# EAGLE board sound-detector-Panel-v10 (EAGLE 6.5.0), part 1 of 2
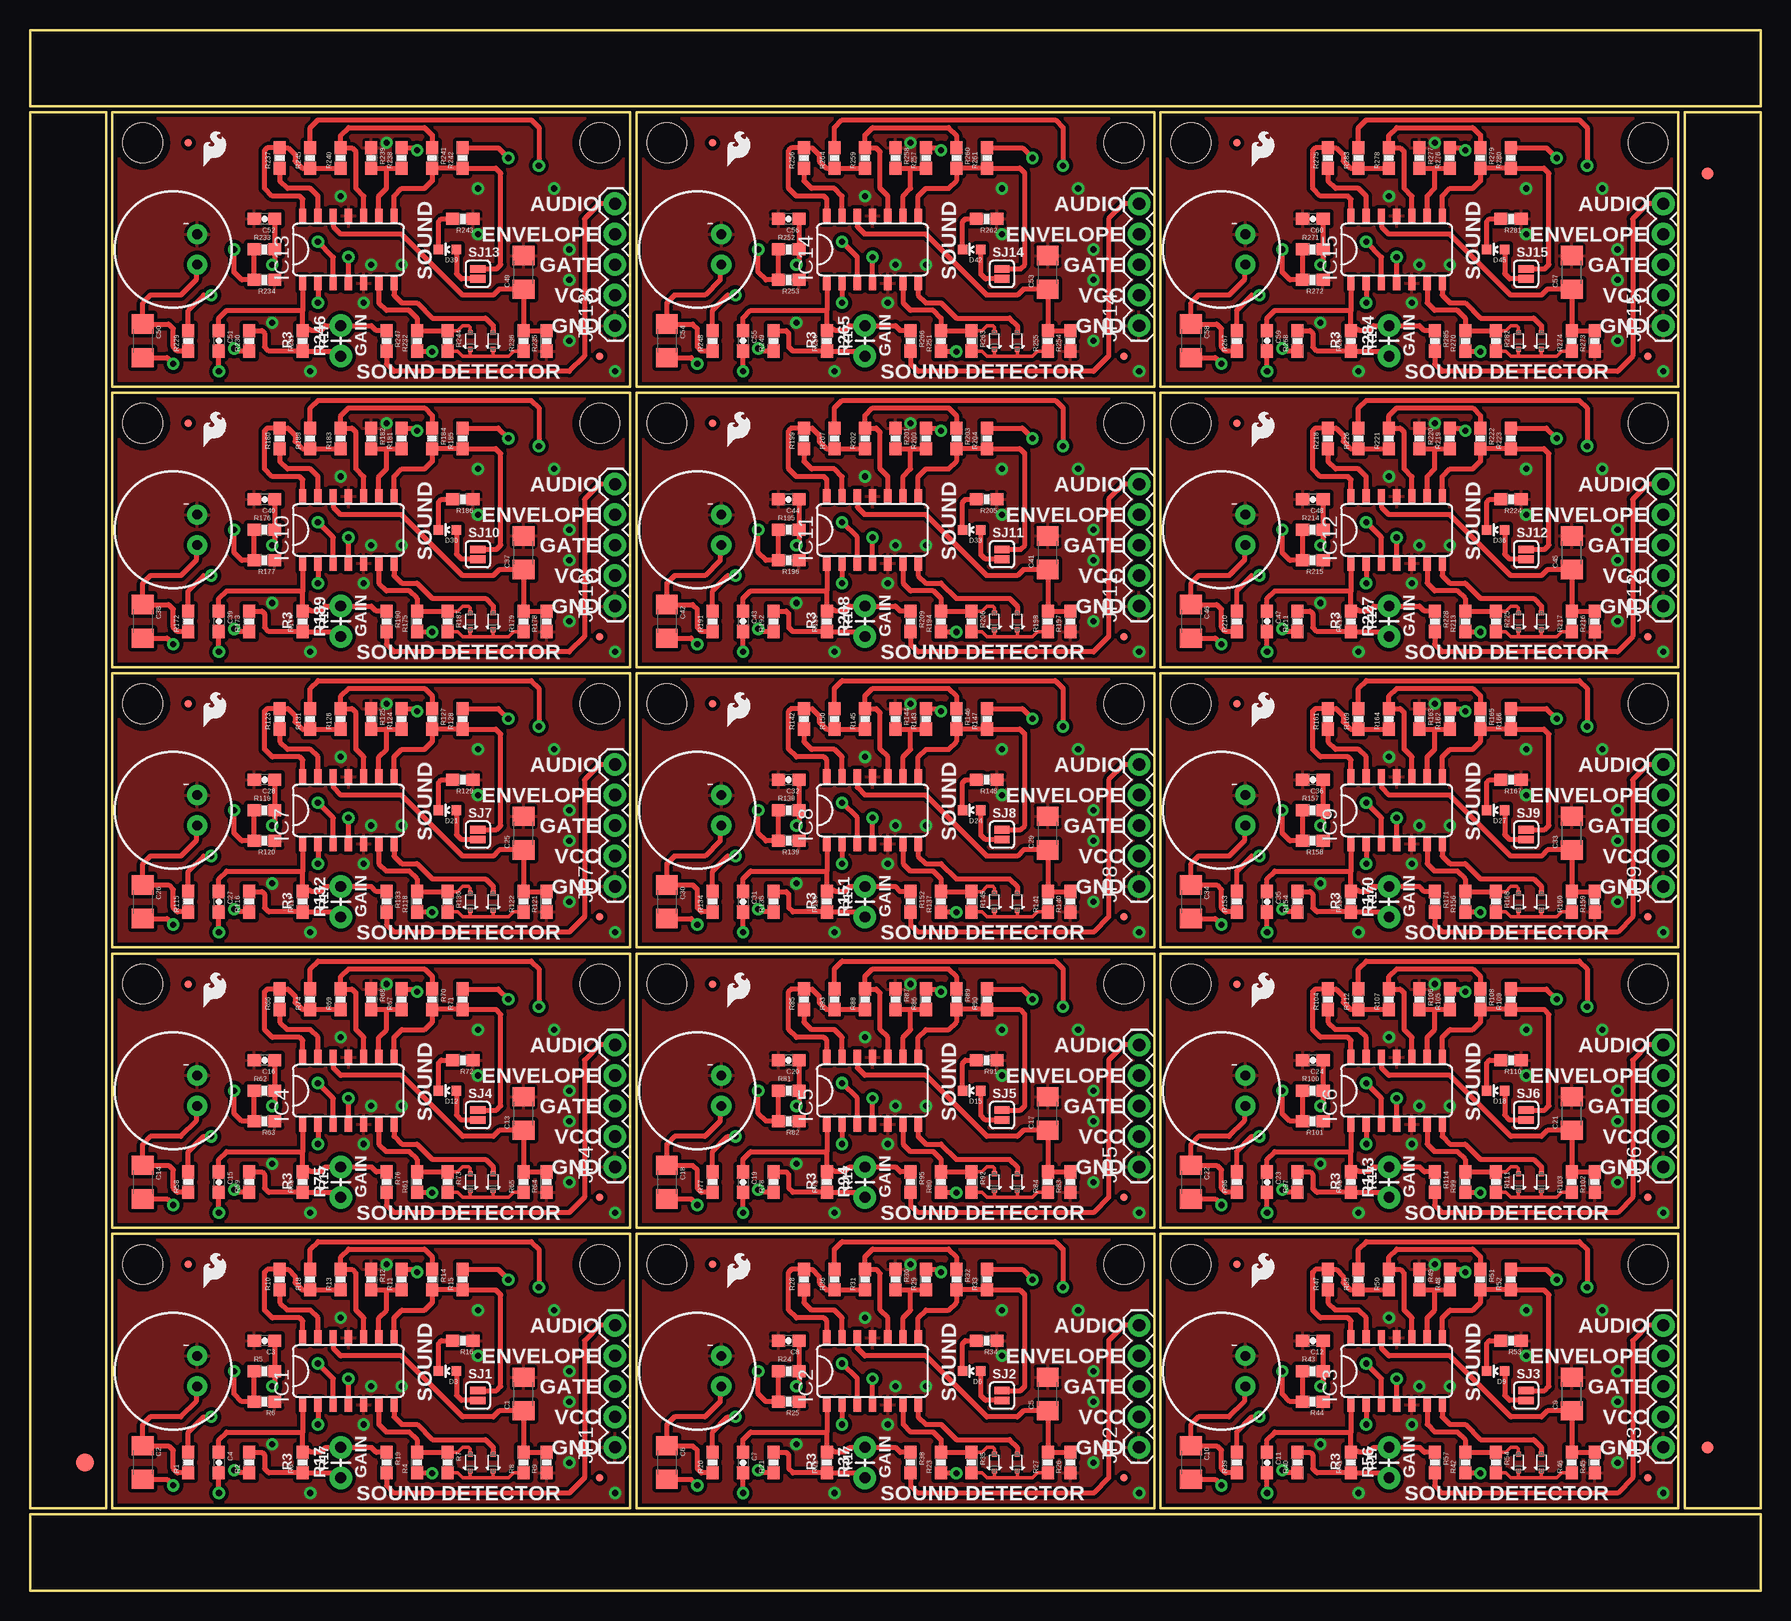
[diagram p0: board, top side]
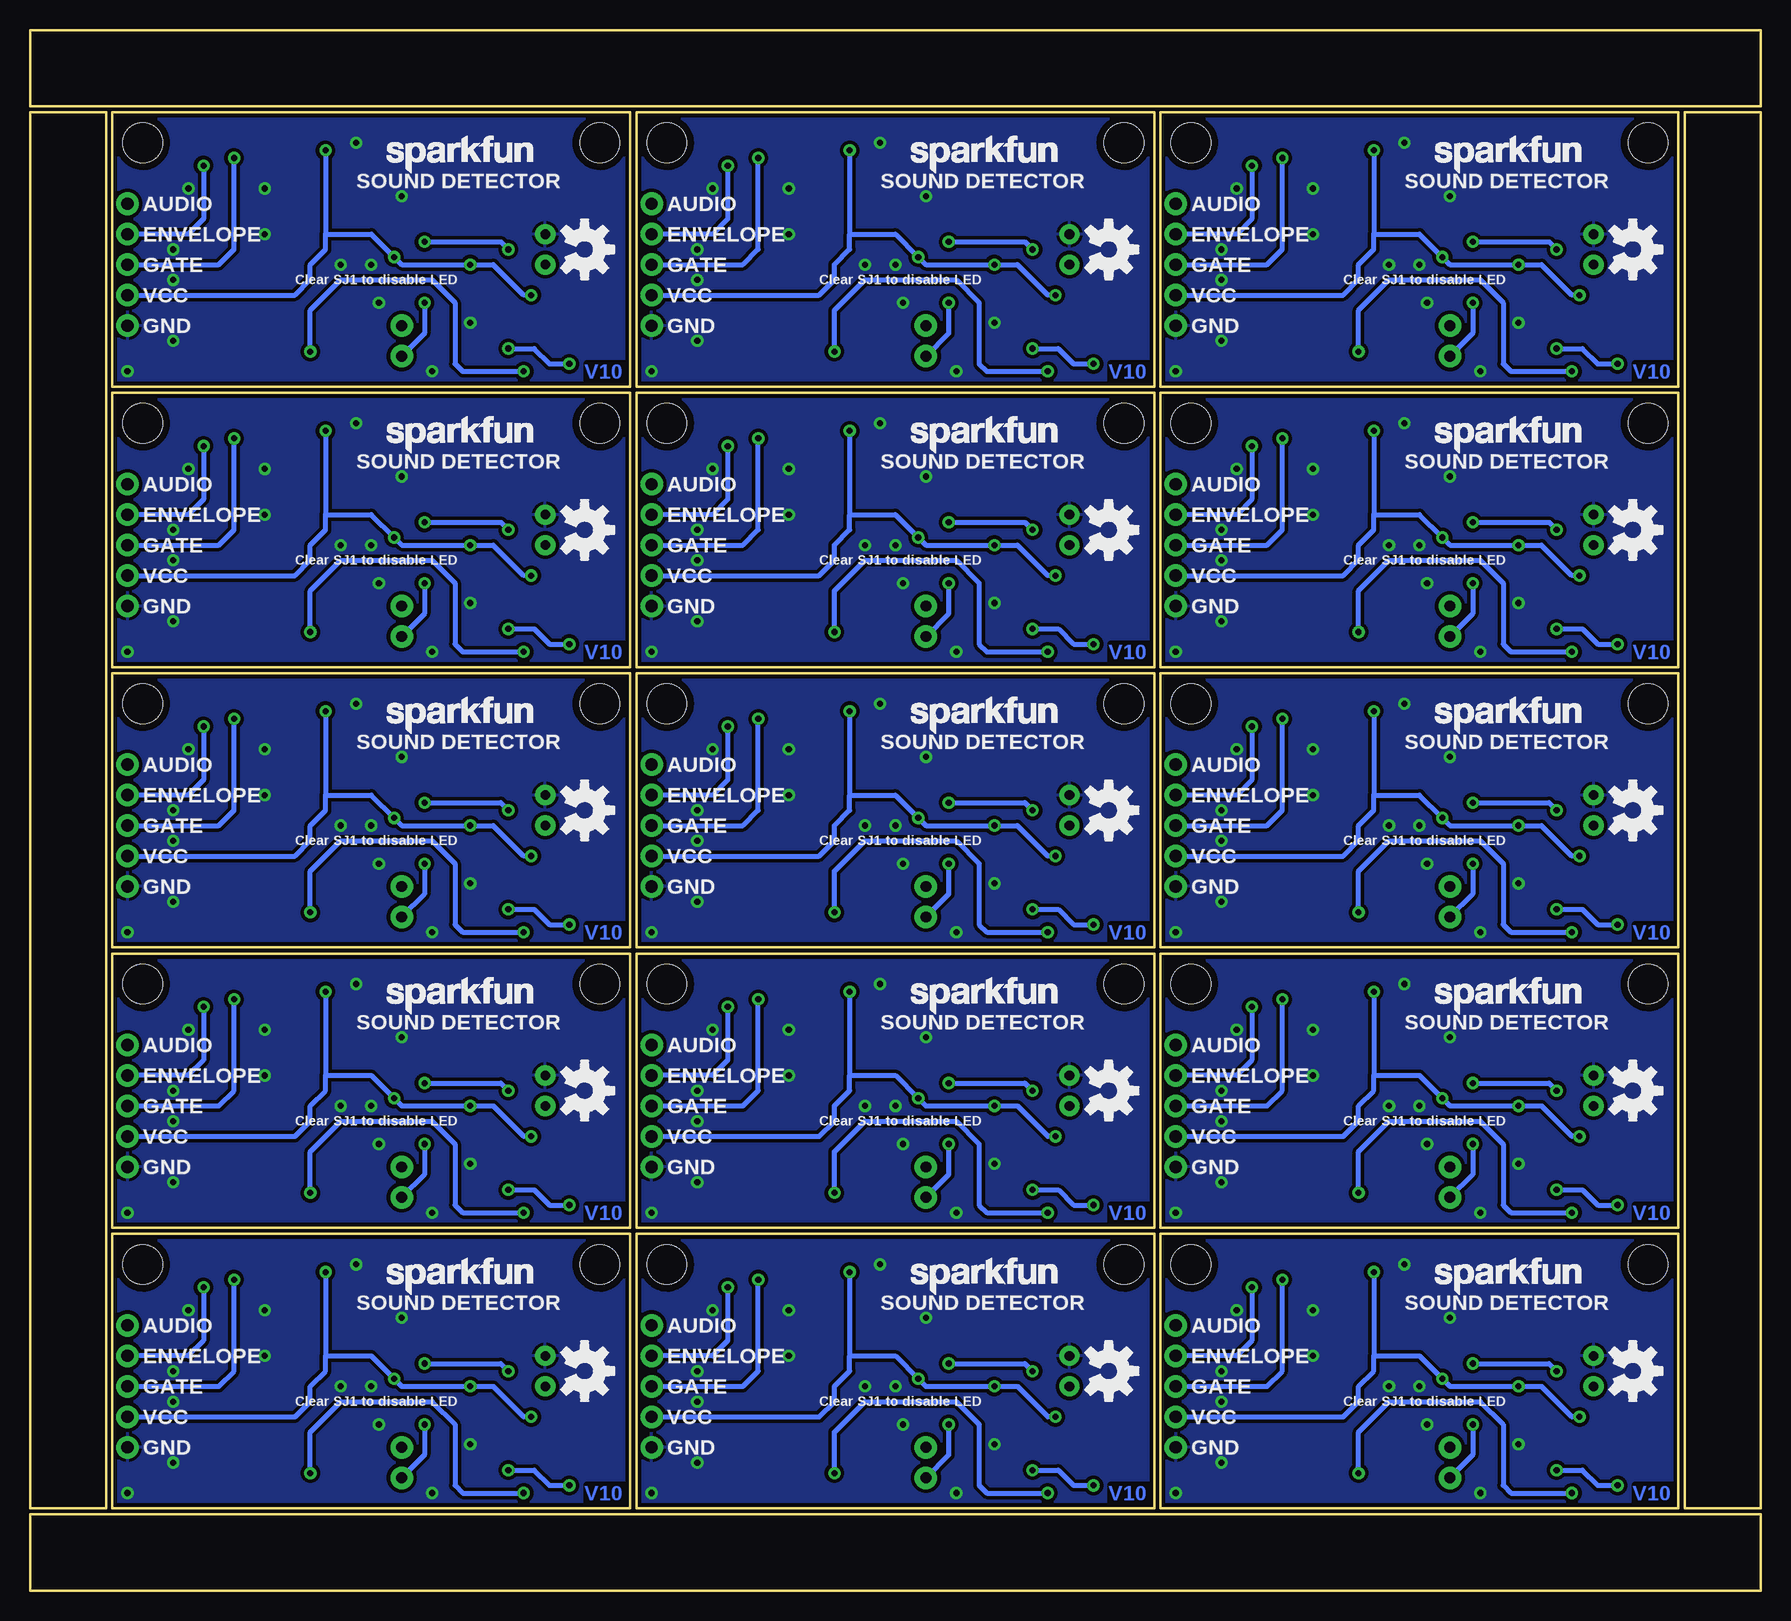
[diagram p1: board, bottom side, seen from below]

Size 144.27 x 130.05 mm. Coordinates in mm from the lower left corner, seen from the top.
Outline: 6.86,6.86 50.04,6.86 50.04,29.72 6.86,29.72 6.86,6.86
Outline: 50.55,6.86 93.73,6.86 93.73,29.72 50.55,29.72 50.55,6.86
Outline: 94.23,6.86 137.41,6.86 137.41,29.72 94.23,29.72 94.23,6.86
Outline: 6.86,30.23 50.04,30.23 50.04,53.09 6.86,53.09 6.86,30.23
Outline: 50.55,30.23 93.73,30.23 93.73,53.09 50.55,53.09 50.55,30.23
Outline: 94.23,30.23 137.41,30.23 137.41,53.09 94.23,53.09 94.23,30.23
Outline: 6.86,53.59 50.04,53.59 50.04,76.45 6.86,76.45 6.86,53.59
Outline: 50.55,53.59 93.73,53.59 93.73,76.45 50.55,76.45 50.55,53.59
Outline: 94.23,53.59 137.41,53.59 137.41,76.45 94.23,76.45 94.23,53.59
Outline: 6.86,76.96 50.04,76.96 50.04,99.82 6.86,99.82 6.86,76.96
Outline: 50.55,76.96 93.73,76.96 93.73,99.82 50.55,99.82 50.55,76.96
Outline: 94.23,76.96 137.41,76.96 137.41,99.82 94.23,99.82 94.23,76.96
Outline: 6.86,100.33 50.04,100.33 50.04,123.19 6.86,123.19 6.86,100.33
Outline: 50.55,100.33 93.73,100.33 93.73,123.19 50.55,123.19 50.55,100.33
Outline: 94.23,100.33 137.41,100.33 137.41,123.19 94.23,123.19 94.23,100.33
Outline: 6.35,6.86 6.35,123.19 0,123.19 0,6.86 6.35,6.86
Outline: 0,0 144.27,0 144.27,6.35 0,6.35 0,0
Outline: 144.27,6.86 144.27,123.19 137.92,123.19 137.92,6.86 144.27,6.86
Outline: 144.27,130.05 0,130.05 0,123.7 144.27,123.7 144.27,130.05
Copper layers (1*16): Top 0.035mm / dielectric 1.5mm / Bottom 0.035mm
Design rules "SparkFun-2-layer *": minimum track width 7mil, minimum drill 15mil, track to track 8mil, track to pad 8mil, pad to pad 8mil, via to via 8mil, smd to smd 8mil, copper to edge 8mil, drill to drill 8mil, minimum pad ring 12mil, minimum via ring 10mil, stop-mask expansion 4mil, vias tented up to drill 20mil, thermal gap 10mil

## Footprints (pad centres in the part's own frame; a part is rotated, then mirrored left to right if it is on the bottom)
1206 = smd 1.6 x 1.8: 1 -1.4,0; 2 1.4,0
0603-CAP = smd 1.1 x 1: 1 -0.85,0; 2 0.85,0
SOD-523 = smd 0.4 x 0.4: A -0.7,0; C 0.7,0
LED-0603 = smd 0.8 x 0.8: A 0,-0.75; C 0,0.75
FIDUCIAL-1.5X3 = smd 1.5 x 1.5: 1 0,0
FIDUCIAL-1X2 = smd 1 x 1: 1 0,0
MICRO-FIDUCIAL = smd 0.635 x 0.635: 1 0,0
SO014 = smd 0.6 x 1.2: 1 -3.175,-2.8; 2 -1.905,-2.8; 3 -0.635,-2.8; 4 0.635,-2.8; 5 1.905,-2.8; 6 3.175,-2.8; 7 4.445,-2.8; 8 4.445,2.8; 9 3.175,2.8; 10 1.905,2.8; 11 0.635,2.8; 12 -0.635,2.8; 13 -1.905,2.8; 14 -3.175,2.8
1X05 = drill 1.016 pad 1.88: 1 0,0; 2 2.54,0; 3 5.08,0; 4 7.62,0; 5 10.16,0
MIC-9.7MM = drill 0.8 pad 1.676: 1 -2,1.27; 2 -2,-1.27
0603-RES = smd 1.1 x 1: 1 -0.85,0; 2 0.85,0
AXIAL-0.1EZ = drill 0.9 pad 1.88: P$1 0,0; P$2 2.54,0
SJ_2S = smd 0.635 x 1.27: 1 -0.412,0; 2 0.412,0
STAND-OFF = hole 3.302: 0,0

## Placement (x,y rotation side)
C1  10uF  [1206]  41.15,16.38 90 top
C2  10uF  [1206]  9.4,10.67 270 top
C3  1.0uF  [0603-CAP]  19.56,20.83 180 top
C4  1.0uF  [0603-CAP]  15.75,10.67 270 top
C5  10uF  [1206]  84.84,16.38 90 top
C6  10uF  [1206]  53.09,10.67 270 top
C7  1.0uF  [0603-CAP]  59.44,10.67 270 top
C8  1.0uF  [0603-CAP]  63.25,20.83 180 top
C9  10uF  [1206]  128.52,16.38 90 top
C10  10uF  [1206]  96.77,10.67 270 top
C11  1.0uF  [0603-CAP]  103.12,10.67 270 top
C12  1.0uF  [0603-CAP]  106.93,20.83 180 top
C13  10uF  [1206]  41.15,39.75 90 top
C14  10uF  [1206]  9.4,34.04 270 top
C15  1.0uF  [0603-CAP]  15.75,34.04 270 top
C16  1.0uF  [0603-CAP]  19.56,44.2 180 top
C17  10uF  [1206]  84.84,39.75 90 top
C18  10uF  [1206]  53.09,34.04 270 top
C19  1.0uF  [0603-CAP]  59.44,34.04 270 top
C20  1.0uF  [0603-CAP]  63.25,44.2 180 top
C21  10uF  [1206]  128.52,39.75 90 top
C22  10uF  [1206]  96.77,34.04 270 top
C23  1.0uF  [0603-CAP]  103.12,34.04 270 top
C24  1.0uF  [0603-CAP]  106.93,44.2 180 top
C25  10uF  [1206]  41.15,63.12 90 top
C26  10uF  [1206]  9.4,57.4 270 top
C27  1.0uF  [0603-CAP]  15.75,57.4 270 top
C28  1.0uF  [0603-CAP]  19.56,67.56 180 top
C29  10uF  [1206]  84.84,63.12 90 top
C30  10uF  [1206]  53.09,57.4 270 top
C31  1.0uF  [0603-CAP]  59.44,57.4 270 top
C32  1.0uF  [0603-CAP]  63.25,67.56 180 top
C33  10uF  [1206]  128.52,63.12 90 top
C34  10uF  [1206]  96.77,57.4 270 top
C35  1.0uF  [0603-CAP]  103.12,57.4 270 top
C36  1.0uF  [0603-CAP]  106.93,67.56 180 top
C37  10uF  [1206]  41.15,86.49 90 top
C38  10uF  [1206]  9.4,80.77 270 top
C39  1.0uF  [0603-CAP]  15.75,80.77 270 top
C40  1.0uF  [0603-CAP]  19.56,90.93 180 top
C41  10uF  [1206]  84.84,86.49 90 top
C42  10uF  [1206]  53.09,80.77 270 top
C43  1.0uF  [0603-CAP]  59.44,80.77 270 top
C44  1.0uF  [0603-CAP]  63.25,90.93 180 top
C45  10uF  [1206]  128.52,86.49 90 top
C46  10uF  [1206]  96.77,80.77 270 top
C47  1.0uF  [0603-CAP]  103.12,80.77 270 top
C48  1.0uF  [0603-CAP]  106.93,90.93 180 top
C49  10uF  [1206]  41.15,109.86 90 top
C50  10uF  [1206]  9.4,104.14 270 top
C51  1.0uF  [0603-CAP]  15.75,104.14 270 top
C52  1.0uF  [0603-CAP]  19.56,114.3 180 top
C53  10uF  [1206]  84.84,109.86 90 top
C54  10uF  [1206]  53.09,104.14 270 top
C55  1.0uF  [0603-CAP]  59.44,104.14 270 top
C56  1.0uF  [0603-CAP]  63.25,114.3 180 top
C57  10uF  [1206]  128.52,109.86 90 top
C58  10uF  [1206]  96.77,104.14 270 top
C59  1.0uF  [0603-CAP]  103.12,104.14 270 top
C60  1.0uF  [0603-CAP]  106.93,114.3 180 top
D1  RB751  [SOD-523]  36.7,10.67 270 top
D2  RB751  [SOD-523]  38.61,10.67 270 top
D3  RED  [LED-0603]  34.8,18.29 90 top
D4  RB751  [SOD-523]  80.39,10.67 270 top
D5  RB751  [SOD-523]  82.3,10.67 270 top
D6  RED  [LED-0603]  78.49,18.29 90 top
D7  RB751  [SOD-523]  124.08,10.67 270 top
D8  RB751  [SOD-523]  125.98,10.67 270 top
D9  RED  [LED-0603]  122.17,18.29 90 top
D10  RB751  [SOD-523]  36.7,34.04 270 top
D11  RB751  [SOD-523]  38.61,34.04 270 top
D12  RED  [LED-0603]  34.8,41.66 90 top
D13  RB751  [SOD-523]  80.39,34.04 270 top
D14  RB751  [SOD-523]  82.3,34.04 270 top
D15  RED  [LED-0603]  78.49,41.66 90 top
D16  RB751  [SOD-523]  124.08,34.04 270 top
D17  RB751  [SOD-523]  125.98,34.04 270 top
D18  RED  [LED-0603]  122.17,41.66 90 top
D19  RB751  [SOD-523]  36.7,57.4 270 top
D20  RB751  [SOD-523]  38.61,57.4 270 top
D21  RED  [LED-0603]  34.8,65.02 90 top
D22  RB751  [SOD-523]  80.39,57.4 270 top
D23  RB751  [SOD-523]  82.3,57.4 270 top
D24  RED  [LED-0603]  78.49,65.02 90 top
D25  RB751  [SOD-523]  124.08,57.4 270 top
D26  RB751  [SOD-523]  125.98,57.4 270 top
D27  RED  [LED-0603]  122.17,65.02 90 top
D28  RB751  [SOD-523]  36.7,80.77 270 top
D29  RB751  [SOD-523]  38.61,80.77 270 top
D30  RED  [LED-0603]  34.8,88.39 90 top
D31  RB751  [SOD-523]  80.39,80.77 270 top
D32  RB751  [SOD-523]  82.3,80.77 270 top
D33  RED  [LED-0603]  78.49,88.39 90 top
D34  RB751  [SOD-523]  124.08,80.77 270 top
D35  RB751  [SOD-523]  125.98,80.77 270 top
D36  RED  [LED-0603]  122.17,88.39 90 top
D37  RB751  [SOD-523]  36.7,104.14 270 top
D38  RB751  [SOD-523]  38.61,104.14 270 top
D39  RED  [LED-0603]  34.8,111.76 90 top
D40  RB751  [SOD-523]  80.39,104.14 270 top
D41  RB751  [SOD-523]  82.3,104.14 270 top
D42  RED  [LED-0603]  78.49,111.76 90 top
D43  RB751  [SOD-523]  124.08,104.14 270 top
D44  RB751  [SOD-523]  125.98,104.14 270 top
D45  RED  [LED-0603]  122.17,111.76 90 top
E$1  [FIDUCIAL-1.5X3]  4.57,10.67 0 top
E$4  [FIDUCIAL-1X2]  139.83,11.94 0 top
E$5  [FIDUCIAL-1X2]  139.83,118.11 180 top
FID1  FIDUCIALUFIDUCIAL  [MICRO-FIDUCIAL]  13.21,27.18 0 top
FID2  FIDUCIALUFIDUCIAL  [MICRO-FIDUCIAL]  47.5,9.4 0 top
FID3  FIDUCIALUFIDUCIAL  [MICRO-FIDUCIAL]  56.9,27.18 0 top
FID4  FIDUCIALUFIDUCIAL  [MICRO-FIDUCIAL]  91.19,9.4 0 top
FID5  FIDUCIALUFIDUCIAL  [MICRO-FIDUCIAL]  100.58,27.18 0 top
FID6  FIDUCIALUFIDUCIAL  [MICRO-FIDUCIAL]  134.87,9.4 0 top
FID7  FIDUCIALUFIDUCIAL  [MICRO-FIDUCIAL]  13.21,50.55 0 top
FID8  FIDUCIALUFIDUCIAL  [MICRO-FIDUCIAL]  47.5,32.77 0 top
FID9  FIDUCIALUFIDUCIAL  [MICRO-FIDUCIAL]  56.9,50.55 0 top
FID10  FIDUCIALUFIDUCIAL  [MICRO-FIDUCIAL]  91.19,32.77 0 top
FID11  FIDUCIALUFIDUCIAL  [MICRO-FIDUCIAL]  100.58,50.55 0 top
FID12  FIDUCIALUFIDUCIAL  [MICRO-FIDUCIAL]  134.87,32.77 0 top
FID13  FIDUCIALUFIDUCIAL  [MICRO-FIDUCIAL]  13.21,73.91 0 top
FID14  FIDUCIALUFIDUCIAL  [MICRO-FIDUCIAL]  47.5,56.13 0 top
FID15  FIDUCIALUFIDUCIAL  [MICRO-FIDUCIAL]  56.9,73.91 0 top
FID16  FIDUCIALUFIDUCIAL  [MICRO-FIDUCIAL]  91.19,56.13 0 top
FID17  FIDUCIALUFIDUCIAL  [MICRO-FIDUCIAL]  100.58,73.91 0 top
FID18  FIDUCIALUFIDUCIAL  [MICRO-FIDUCIAL]  134.87,56.13 0 top
FID19  FIDUCIALUFIDUCIAL  [MICRO-FIDUCIAL]  13.21,97.28 0 top
FID20  FIDUCIALUFIDUCIAL  [MICRO-FIDUCIAL]  47.5,79.5 0 top
FID21  FIDUCIALUFIDUCIAL  [MICRO-FIDUCIAL]  56.9,97.28 0 top
FID22  FIDUCIALUFIDUCIAL  [MICRO-FIDUCIAL]  91.19,79.5 0 top
FID23  FIDUCIALUFIDUCIAL  [MICRO-FIDUCIAL]  100.58,97.28 0 top
FID24  FIDUCIALUFIDUCIAL  [MICRO-FIDUCIAL]  134.87,79.5 0 top
FID25  FIDUCIALUFIDUCIAL  [MICRO-FIDUCIAL]  13.21,120.65 0 top
FID26  FIDUCIALUFIDUCIAL  [MICRO-FIDUCIAL]  47.5,102.87 0 top
FID27  FIDUCIALUFIDUCIAL  [MICRO-FIDUCIAL]  56.9,120.65 0 top
FID28  FIDUCIALUFIDUCIAL  [MICRO-FIDUCIAL]  91.19,102.87 0 top
FID29  FIDUCIALUFIDUCIAL  [MICRO-FIDUCIAL]  100.58,120.65 0 top
FID30  FIDUCIALUFIDUCIAL  [MICRO-FIDUCIAL]  134.87,102.87 0 top
IC1  LMV324  [SO014]  25.91,18.29 0 top
IC2  LMV324  [SO014]  69.6,18.29 0 top
IC3  LMV324  [SO014]  113.28,18.29 0 top
IC4  LMV324  [SO014]  25.91,41.66 0 top
IC5  LMV324  [SO014]  69.6,41.66 0 top
IC6  LMV324  [SO014]  113.28,41.66 0 top
IC7  LMV324  [SO014]  25.91,65.02 0 top
IC8  LMV324  [SO014]  69.6,65.02 0 top
IC9  LMV324  [SO014]  113.28,65.02 0 top
IC10  LMV324  [SO014]  25.91,88.39 0 top
IC11  LMV324  [SO014]  69.6,88.39 0 top
IC12  LMV324  [SO014]  113.28,88.39 0 top
IC13  LMV324  [SO014]  25.91,111.76 0 top
IC14  LMV324  [SO014]  69.6,111.76 0 top
IC15  LMV324  [SO014]  113.28,111.76 0 top
JP1  IO Connector  [1X05]  48.77,11.94 90 top
JP2  IO Connector  [1X05]  92.46,11.94 90 top
JP3  IO Connector  [1X05]  136.14,11.94 90 top
JP4  IO Connector  [1X05]  48.77,35.31 90 top
JP5  IO Connector  [1X05]  92.46,35.31 90 top
JP6  IO Connector  [1X05]  136.14,35.31 90 top
JP7  IO Connector  [1X05]  48.77,58.67 90 top
JP8  IO Connector  [1X05]  92.46,58.67 90 top
JP9  IO Connector  [1X05]  136.14,58.67 90 top
JP10  IO Connector  [1X05]  48.77,82.04 90 top
JP11  IO Connector  [1X05]  92.46,82.04 90 top
JP12  IO Connector  [1X05]  136.14,82.04 90 top
JP13  IO Connector  [1X05]  48.77,105.41 90 top
JP14  IO Connector  [1X05]  92.46,105.41 90 top
JP15  IO Connector  [1X05]  136.14,105.41 90 top
LOGO1  OSHW-LOGOM  [OSHW-LOGO-M]  10.67,18.29 270 bottom
LOGO2  LOGO-SFENW2  [SFE-NEW-WEB]  27.18,24.64 0 bottom
LOGO3  LOGO-SFESK  [SFE-LOGO-FLAME]  14.48,25.27 0 top
LOGO4  OSHW-LOGOM  [OSHW-LOGO-M]  54.36,18.29 270 bottom
LOGO5  LOGO-SFENW2  [SFE-NEW-WEB]  70.87,24.64 0 bottom
LOGO6  LOGO-SFESK  [SFE-LOGO-FLAME]  58.17,25.27 0 top
LOGO7  OSHW-LOGOM  [OSHW-LOGO-M]  98.04,18.29 270 bottom
LOGO8  LOGO-SFENW2  [SFE-NEW-WEB]  114.55,24.64 0 bottom
LOGO9  LOGO-SFESK  [SFE-LOGO-FLAME]  101.85,25.27 0 top
LOGO10  OSHW-LOGOM  [OSHW-LOGO-M]  10.67,41.66 270 bottom
LOGO11  LOGO-SFENW2  [SFE-NEW-WEB]  27.18,48.01 0 bottom
LOGO12  LOGO-SFESK  [SFE-LOGO-FLAME]  14.48,48.64 0 top
LOGO13  OSHW-LOGOM  [OSHW-LOGO-M]  54.36,41.66 270 bottom
LOGO14  LOGO-SFENW2  [SFE-NEW-WEB]  70.87,48.01 0 bottom
LOGO15  LOGO-SFESK  [SFE-LOGO-FLAME]  58.17,48.64 0 top
LOGO16  OSHW-LOGOM  [OSHW-LOGO-M]  98.04,41.66 270 bottom
LOGO17  LOGO-SFENW2  [SFE-NEW-WEB]  114.55,48.01 0 bottom
LOGO18  LOGO-SFESK  [SFE-LOGO-FLAME]  101.85,48.64 0 top
LOGO19  OSHW-LOGOM  [OSHW-LOGO-M]  10.67,65.02 270 bottom
LOGO20  LOGO-SFENW2  [SFE-NEW-WEB]  27.18,71.37 0 bottom
LOGO21  LOGO-SFESK  [SFE-LOGO-FLAME]  14.48,72.01 0 top
LOGO22  OSHW-LOGOM  [OSHW-LOGO-M]  54.36,65.02 270 bottom
LOGO23  LOGO-SFENW2  [SFE-NEW-WEB]  70.87,71.37 0 bottom
LOGO24  LOGO-SFESK  [SFE-LOGO-FLAME]  58.17,72.01 0 top
LOGO25  OSHW-LOGOM  [OSHW-LOGO-M]  98.04,65.02 270 bottom
LOGO26  LOGO-SFENW2  [SFE-NEW-WEB]  114.55,71.37 0 bottom
LOGO27  LOGO-SFESK  [SFE-LOGO-FLAME]  101.85,72.01 0 top
LOGO28  OSHW-LOGOM  [OSHW-LOGO-M]  10.67,88.39 270 bottom
LOGO29  LOGO-SFENW2  [SFE-NEW-WEB]  27.18,94.74 0 bottom
LOGO30  LOGO-SFESK  [SFE-LOGO-FLAME]  14.48,95.38 0 top
LOGO31  OSHW-LOGOM  [OSHW-LOGO-M]  54.36,88.39 270 bottom
LOGO32  LOGO-SFENW2  [SFE-NEW-WEB]  70.87,94.74 0 bottom
LOGO33  LOGO-SFESK  [SFE-LOGO-FLAME]  58.17,95.38 0 top
LOGO34  OSHW-LOGOM  [OSHW-LOGO-M]  98.04,88.39 270 bottom
LOGO35  LOGO-SFENW2  [SFE-NEW-WEB]  114.55,94.74 0 bottom
LOGO36  LOGO-SFESK  [SFE-LOGO-FLAME]  101.85,95.38 0 top
LOGO37  OSHW-LOGOM  [OSHW-LOGO-M]  10.67,111.76 270 bottom
LOGO38  LOGO-SFENW2  [SFE-NEW-WEB]  27.18,118.11 0 bottom
LOGO39  LOGO-SFESK  [SFE-LOGO-FLAME]  14.48,118.75 0 top
LOGO40  OSHW-LOGOM  [OSHW-LOGO-M]  54.36,111.76 270 bottom
LOGO41  LOGO-SFENW2  [SFE-NEW-WEB]  70.87,118.11 0 bottom
LOGO42  LOGO-SFESK  [SFE-LOGO-FLAME]  58.17,118.75 0 top
LOGO43  OSHW-LOGOM  [OSHW-LOGO-M]  98.04,111.76 270 bottom
LOGO44  LOGO-SFENW2  [SFE-NEW-WEB]  114.55,118.11 0 bottom
LOGO45  LOGO-SFESK  [SFE-LOGO-FLAME]  101.85,118.75 0 top
MIC1  MIC9.7MM  [MIC-9.7MM]  11.94,18.29 180 top
MIC2  MIC9.7MM  [MIC-9.7MM]  55.63,18.29 180 top
MIC3  MIC9.7MM  [MIC-9.7MM]  99.31,18.29 180 top
MIC4  MIC9.7MM  [MIC-9.7MM]  11.94,41.66 180 top
MIC5  MIC9.7MM  [MIC-9.7MM]  55.63,41.66 180 top
MIC6  MIC9.7MM  [MIC-9.7MM]  99.31,41.66 180 top
MIC7  MIC9.7MM  [MIC-9.7MM]  11.94,65.02 180 top
MIC8  MIC9.7MM  [MIC-9.7MM]  55.63,65.02 180 top
MIC9  MIC9.7MM  [MIC-9.7MM]  99.31,65.02 180 top
MIC10  MIC9.7MM  [MIC-9.7MM]  11.94,88.39 180 top
MIC11  MIC9.7MM  [MIC-9.7MM]  55.63,88.39 180 top
MIC12  MIC9.7MM  [MIC-9.7MM]  99.31,88.39 180 top
MIC13  MIC9.7MM  [MIC-9.7MM]  11.94,111.76 180 top
MIC14  MIC9.7MM  [MIC-9.7MM]  55.63,111.76 180 top
MIC15  MIC9.7MM  [MIC-9.7MM]  99.31,111.76 180 top
R1  2.2k  [0603-RES]  13.21,10.67 90 top
R2  1K  [0603-RES]  18.29,10.67 90 top
R3  100k  [0603-RES]  22.73,10.67 90 top
R4  10K  [0603-RES]  32.26,10.67 90 top
R5  10K  [0603-RES]  19.56,18.29 0 top
R6  10K  [0603-RES]  19.56,15.75 180 top
R7  22K  [0603-RES]  34.8,10.67 270 top
R8  100  [0603-RES]  41.15,10.67 90 top
R9  10K  [0603-RES]  43.05,10.67 90 top
R10  1K  [0603-RES]  20.83,25.91 90 top
R11  100k  [0603-RES]  30.99,25.91 90 top
R12  3.3k  [0603-RES]  28.45,25.91 270 top
R13  1K  [0603-RES]  25.91,25.91 90 top
R14  100k  [0603-RES]  33.53,25.91 270 top
R15  100  [0603-RES]  36.07,25.91 90 top
R16  2.2k  [0603-RES]  36.07,20.83 180 top
R17  GAIN  [AXIAL-0.1EZ]  25.91,9.4 90 top
R18  100  [0603-RES]  23.37,25.91 90 top
R19  100  [0603-RES]  29.72,10.67 270 top
R20  2.2k  [0603-RES]  56.9,10.67 90 top
R21  1K  [0603-RES]  61.98,10.67 90 top
R22  100k  [0603-RES]  66.42,10.67 90 top
R23  10K  [0603-RES]  75.95,10.67 90 top
R24  10K  [0603-RES]  63.25,18.29 0 top
R25  10K  [0603-RES]  63.25,15.75 180 top
R26  10K  [0603-RES]  86.74,10.67 90 top
R27  100  [0603-RES]  84.84,10.67 90 top
R28  1K  [0603-RES]  64.52,25.91 90 top
R29  100k  [0603-RES]  74.68,25.91 90 top
R30  3.3k  [0603-RES]  72.14,25.91 270 top
R31  1K  [0603-RES]  69.6,25.91 90 top
R32  100k  [0603-RES]  77.22,25.91 270 top
R33  100  [0603-RES]  79.76,25.91 90 top
R34  2.2k  [0603-RES]  79.76,20.83 180 top
R35  22K  [0603-RES]  78.49,10.67 270 top
R36  100  [0603-RES]  67.06,25.91 90 top
R37  GAIN  [AXIAL-0.1EZ]  69.6,9.4 90 top
R38  100  [0603-RES]  73.41,10.67 270 top
R39  2.2k  [0603-RES]  100.58,10.67 90 top
R40  1K  [0603-RES]  105.66,10.67 90 top
R41  100k  [0603-RES]  110.11,10.67 90 top
R42  10K  [0603-RES]  119.63,10.67 90 top
R43  10K  [0603-RES]  106.93,18.29 0 top
R44  10K  [0603-RES]  106.93,15.75 180 top
R45  10K  [0603-RES]  130.43,10.67 90 top
R46  100  [0603-RES]  128.52,10.67 90 top
R47  1K  [0603-RES]  108.2,25.91 90 top
R48  100k  [0603-RES]  118.36,25.91 90 top
R49  3.3k  [0603-RES]  115.82,25.91 270 top
R50  1K  [0603-RES]  113.28,25.91 90 top
R51  100k  [0603-RES]  120.9,25.91 270 top
R52  100  [0603-RES]  123.44,25.91 90 top
R53  2.2k  [0603-RES]  123.44,20.83 180 top
R54  22K  [0603-RES]  122.17,10.67 270 top
R55  100  [0603-RES]  110.74,25.91 90 top
R56  GAIN  [AXIAL-0.1EZ]  113.28,9.4 90 top
R57  100  [0603-RES]  117.09,10.67 270 top
R58  2.2k  [0603-RES]  13.21,34.04 90 top
R59  1K  [0603-RES]  18.29,34.04 90 top
R60  100k  [0603-RES]  22.73,34.04 90 top
R61  10K  [0603-RES]  32.26,34.04 90 top
R62  10K  [0603-RES]  19.56,41.66 0 top
R63  10K  [0603-RES]  19.56,39.12 180 top
R64  10K  [0603-RES]  43.05,34.04 90 top
R65  100  [0603-RES]  41.15,34.04 90 top
R66  1K  [0603-RES]  20.83,49.28 90 top
R67  100k  [0603-RES]  30.99,49.28 90 top
R68  3.3k  [0603-RES]  28.45,49.28 270 top
R69  1K  [0603-RES]  25.91,49.28 90 top
R70  100k  [0603-RES]  33.53,49.28 270 top
R71  100  [0603-RES]  36.07,49.28 90 top
R72  2.2k  [0603-RES]  36.07,44.2 180 top
R73  22K  [0603-RES]  34.8,34.04 270 top
R74  100  [0603-RES]  23.37,49.28 90 top
R75  GAIN  [AXIAL-0.1EZ]  25.91,32.77 90 top
R76  100  [0603-RES]  29.72,34.04 270 top
R77  2.2k  [0603-RES]  56.9,34.04 90 top
R78  1K  [0603-RES]  61.98,34.04 90 top
R79  100k  [0603-RES]  66.42,34.04 90 top
R80  10K  [0603-RES]  75.95,34.04 90 top
R81  10K  [0603-RES]  63.25,41.66 0 top
R82  10K  [0603-RES]  63.25,39.12 180 top
R83  10K  [0603-RES]  86.74,34.04 90 top
R84  100  [0603-RES]  84.84,34.04 90 top
R85  1K  [0603-RES]  64.52,49.28 90 top
R86  100k  [0603-RES]  74.68,49.28 90 top
R87  3.3k  [0603-RES]  72.14,49.28 270 top
R88  1K  [0603-RES]  69.6,49.28 90 top
R89  100k  [0603-RES]  77.22,49.28 270 top
R90  100  [0603-RES]  79.76,49.28 90 top
R91  2.2k  [0603-RES]  79.76,44.2 180 top
R92  22K  [0603-RES]  78.49,34.04 270 top
R93  100  [0603-RES]  67.06,49.28 90 top
R94  GAIN  [AXIAL-0.1EZ]  69.6,32.77 90 top
R95  100  [0603-RES]  73.41,34.04 270 top
R96  2.2k  [0603-RES]  100.58,34.04 90 top
R97  1K  [0603-RES]  105.66,34.04 90 top
R98  100k  [0603-RES]  110.11,34.04 90 top
R99  10K  [0603-RES]  119.63,34.04 90 top
R100  10K  [0603-RES]  106.93,41.66 0 top
R101  10K  [0603-RES]  106.93,39.12 180 top
R102  10K  [0603-RES]  130.43,34.04 90 top
R103  100  [0603-RES]  128.52,34.04 90 top
R104  1K  [0603-RES]  108.2,49.28 90 top
R105  100k  [0603-RES]  118.36,49.28 90 top
R106  3.3k  [0603-RES]  115.82,49.28 270 top
R107  1K  [0603-RES]  113.28,49.28 90 top
R108  100k  [0603-RES]  120.9,49.28 270 top
R109  100  [0603-RES]  123.44,49.28 90 top
R110  2.2k  [0603-RES]  123.44,44.2 180 top
R111  22K  [0603-RES]  122.17,34.04 270 top
R112  100  [0603-RES]  110.74,49.28 90 top
R113  GAIN  [AXIAL-0.1EZ]  113.28,32.77 90 top
R114  100  [0603-RES]  117.09,34.04 270 top
R115  2.2k  [0603-RES]  13.21,57.4 90 top
R116  1K  [0603-RES]  18.29,57.4 90 top
R117  100k  [0603-RES]  22.73,57.4 90 top
R118  10K  [0603-RES]  32.26,57.4 90 top
R119  10K  [0603-RES]  19.56,65.02 0 top
R120  10K  [0603-RES]  19.56,62.48 180 top
R121  10K  [0603-RES]  43.05,57.4 90 top
R122  100  [0603-RES]  41.15,57.4 90 top
R123  1K  [0603-RES]  20.83,72.64 90 top
R124  100k  [0603-RES]  30.99,72.64 90 top
R125  3.3k  [0603-RES]  28.45,72.64 270 top
R126  1K  [0603-RES]  25.91,72.64 90 top
R127  100k  [0603-RES]  33.53,72.64 270 top
R128  100  [0603-RES]  36.07,72.64 90 top
R129  2.2k  [0603-RES]  36.07,67.56 180 top
R130  22K  [0603-RES]  34.8,57.4 270 top
R131  100  [0603-RES]  23.37,72.64 90 top
R132  GAIN  [AXIAL-0.1EZ]  25.91,56.13 90 top
R133  100  [0603-RES]  29.72,57.4 270 top
R134  2.2k  [0603-RES]  56.9,57.4 90 top
R135  1K  [0603-RES]  61.98,57.4 90 top
R136  100k  [0603-RES]  66.42,57.4 90 top
R137  10K  [0603-RES]  75.95,57.4 90 top
R138  10K  [0603-RES]  63.25,65.02 0 top
R139  10K  [0603-RES]  63.25,62.48 180 top
R140  10K  [0603-RES]  86.74,57.4 90 top
R141  100  [0603-RES]  84.84,57.4 90 top
R142  1K  [0603-RES]  64.52,72.64 90 top
R143  100k  [0603-RES]  74.68,72.64 90 top
R144  3.3k  [0603-RES]  72.14,72.64 270 top
R145  1K  [0603-RES]  69.6,72.64 90 top
R146  100k  [0603-RES]  77.22,72.64 270 top
R147  100  [0603-RES]  79.76,72.64 90 top
R148  2.2k  [0603-RES]  79.76,67.56 180 top
R149  22K  [0603-RES]  78.49,57.4 270 top
R150  100  [0603-RES]  67.06,72.64 90 top
R151  GAIN  [AXIAL-0.1EZ]  69.6,56.13 90 top
R152  100  [0603-RES]  73.41,57.4 270 top
R153  2.2k  [0603-RES]  100.58,57.4 90 top
R154  1K  [0603-RES]  105.66,57.4 90 top
R155  100k  [0603-RES]  110.11,57.4 90 top
R156  10K  [0603-RES]  119.63,57.4 90 top
R157  10K  [0603-RES]  106.93,65.02 0 top
R158  10K  [0603-RES]  106.93,62.48 180 top
R159  10K  [0603-RES]  130.43,57.4 90 top
R160  100  [0603-RES]  128.52,57.4 90 top
R161  1K  [0603-RES]  108.2,72.64 90 top
R162  100k  [0603-RES]  118.36,72.64 90 top
R163  3.3k  [0603-RES]  115.82,72.64 270 top
R164  1K  [0603-RES]  113.28,72.64 90 top
R165  100k  [0603-RES]  120.9,72.64 270 top
R166  100  [0603-RES]  123.44,72.64 90 top
R167  2.2k  [0603-RES]  123.44,67.56 180 top
R168  22K  [0603-RES]  122.17,57.4 270 top
R169  100  [0603-RES]  110.74,72.64 90 top
R170  GAIN  [AXIAL-0.1EZ]  113.28,56.13 90 top
R171  100  [0603-RES]  117.09,57.4 270 top
R172  2.2k  [0603-RES]  13.21,80.77 90 top
R173  1K  [0603-RES]  18.29,80.77 90 top
R174  100k  [0603-RES]  22.73,80.77 90 top
R175  10K  [0603-RES]  32.26,80.77 90 top
R176  10K  [0603-RES]  19.56,88.39 0 top
R177  10K  [0603-RES]  19.56,85.85 180 top
R178  10K  [0603-RES]  43.05,80.77 90 top
R179  100  [0603-RES]  41.15,80.77 90 top
R180  1K  [0603-RES]  20.83,96.01 90 top
R181  100k  [0603-RES]  30.99,96.01 90 top
R182  3.3k  [0603-RES]  28.45,96.01 270 top
R183  1K  [0603-RES]  25.91,96.01 90 top
R184  100k  [0603-RES]  33.53,96.01 270 top
R185  100  [0603-RES]  36.07,96.01 90 top
R186  2.2k  [0603-RES]  36.07,90.93 180 top
R187  22K  [0603-RES]  34.8,80.77 270 top
R188  100  [0603-RES]  23.37,96.01 90 top
R189  GAIN  [AXIAL-0.1EZ]  25.91,79.5 90 top
R190  100  [0603-RES]  29.72,80.77 270 top
R191  2.2k  [0603-RES]  56.9,80.77 90 top
R192  1K  [0603-RES]  61.98,80.77 90 top
R193  100k  [0603-RES]  66.42,80.77 90 top
R194  10K  [0603-RES]  75.95,80.77 90 top
R195  10K  [0603-RES]  63.25,88.39 0 top
R196  10K  [0603-RES]  63.25,85.85 180 top
R197  10K  [0603-RES]  86.74,80.77 90 top
R198  100  [0603-RES]  84.84,80.77 90 top
R199  1K  [0603-RES]  64.52,96.01 90 top
R200  100k  [0603-RES]  74.68,96.01 90 top
R201  3.3k  [0603-RES]  72.14,96.01 270 top
R202  1K  [0603-RES]  69.6,96.01 90 top
R203  100k  [0603-RES]  77.22,96.01 270 top
R204  100  [0603-RES]  79.76,96.01 90 top
R205  2.2k  [0603-RES]  79.76,90.93 180 top
R206  22K  [0603-RES]  78.49,80.77 270 top
R207  100  [0603-RES]  67.06,96.01 90 top
R208  GAIN  [AXIAL-0.1EZ]  69.6,79.5 90 top
R209  100  [0603-RES]  73.41,80.77 270 top
R210  2.2k  [0603-RES]  100.58,80.77 90 top
R211  1K  [0603-RES]  105.66,80.77 90 top
R212  100k  [0603-RES]  110.11,80.77 90 top
R213  10K  [0603-RES]  119.63,80.77 90 top
R214  10K  [0603-RES]  106.93,88.39 0 top
R215  10K  [0603-RES]  106.93,85.85 180 top
R216  10K  [0603-RES]  130.43,80.77 90 top
R217  100  [0603-RES]  128.52,80.77 90 top
R218  1K  [0603-RES]  108.2,96.01 90 top
R219  100k  [0603-RES]  118.36,96.01 90 top
R220  3.3k  [0603-RES]  115.82,96.01 270 top
R221  1K  [0603-RES]  113.28,96.01 90 top
R222  100k  [0603-RES]  120.9,96.01 270 top
R223  100  [0603-RES]  123.44,96.01 90 top
R224  2.2k  [0603-RES]  123.44,90.93 180 top
R225  22K  [0603-RES]  122.17,80.77 270 top
R226  100  [0603-RES]  110.74,96.01 90 top
R227  GAIN  [AXIAL-0.1EZ]  113.28,79.5 90 top
R228  100  [0603-RES]  117.09,80.77 270 top
R229  2.2k  [0603-RES]  13.21,104.14 90 top
R230  1K  [0603-RES]  18.29,104.14 90 top
R231  100k  [0603-RES]  22.73,104.14 90 top
R232  10K  [0603-RES]  32.26,104.14 90 top
R233  10K  [0603-RES]  19.56,111.76 0 top
R234  10K  [0603-RES]  19.56,109.22 180 top
R235  10K  [0603-RES]  43.05,104.14 90 top
R236  100  [0603-RES]  41.15,104.14 90 top
R237  1K  [0603-RES]  20.83,119.38 90 top
R238  100k  [0603-RES]  30.99,119.38 90 top
R239  3.3k  [0603-RES]  28.45,119.38 270 top
R240  1K  [0603-RES]  25.91,119.38 90 top
R241  100k  [0603-RES]  33.53,119.38 270 top
R242  100  [0603-RES]  36.07,119.38 90 top
R243  2.2k  [0603-RES]  36.07,114.3 180 top
R244  22K  [0603-RES]  34.8,104.14 270 top
R245  100  [0603-RES]  23.37,119.38 90 top
R246  GAIN  [AXIAL-0.1EZ]  25.91,102.87 90 top
R247  100  [0603-RES]  29.72,104.14 270 top
R248  2.2k  [0603-RES]  56.9,104.14 90 top
R249  1K  [0603-RES]  61.98,104.14 90 top
R250  100k  [0603-RES]  66.42,104.14 90 top
R251  10K  [0603-RES]  75.95,104.14 90 top
R252  10K  [0603-RES]  63.25,111.76 0 top
R253  10K  [0603-RES]  63.25,109.22 180 top
R254  10K  [0603-RES]  86.74,104.14 90 top
R255  100  [0603-RES]  84.84,104.14 90 top
R256  1K  [0603-RES]  64.52,119.38 90 top
R257  100k  [0603-RES]  74.68,119.38 90 top
R258  3.3k  [0603-RES]  72.14,119.38 270 top
R259  1K  [0603-RES]  69.6,119.38 90 top
R260  100k  [0603-RES]  77.22,119.38 270 top
R261  100  [0603-RES]  79.76,119.38 90 top
R262  2.2k  [0603-RES]  79.76,114.3 180 top
R263  22K  [0603-RES]  78.49,104.14 270 top
R264  100  [0603-RES]  67.06,119.38 90 top
R265  GAIN  [AXIAL-0.1EZ]  69.6,102.87 90 top
R266  100  [0603-RES]  73.41,104.14 270 top
R267  2.2k  [0603-RES]  100.58,104.14 90 top
R268  1K  [0603-RES]  105.66,104.14 90 top
R269  100k  [0603-RES]  110.11,104.14 90 top
R270  10K  [0603-RES]  119.63,104.14 90 top
R271  10K  [0603-RES]  106.93,111.76 0 top
R272  10K  [0603-RES]  106.93,109.22 180 top
R273  10K  [0603-RES]  130.43,104.14 90 top
R274  100  [0603-RES]  128.52,104.14 90 top
R275  1K  [0603-RES]  108.2,119.38 90 top
R276  100k  [0603-RES]  118.36,119.38 90 top
R277  3.3k  [0603-RES]  115.82,119.38 270 top
R278  1K  [0603-RES]  113.28,119.38 90 top
R279  100k  [0603-RES]  120.9,119.38 270 top
R280  100  [0603-RES]  123.44,119.38 90 top
R281  2.2k  [0603-RES]  123.44,114.3 180 top
R282  22K  [0603-RES]  122.17,104.14 270 top
R283  100  [0603-RES]  110.74,119.38 90 top
R284  GAIN  [AXIAL-0.1EZ]  113.28,102.87 90 top
R285  100  [0603-RES]  117.09,104.14 270 top
SJ1  Disable LED  [SJ_2S]  37.34,16.26 90 top
SJ2  Disable LED  [SJ_2S]  81.03,16.26 90 top
SJ3  Disable LED  [SJ_2S]  124.71,16.26 90 top
SJ4  Disable LED  [SJ_2S]  37.34,39.62 90 top
SJ5  Disable LED  [SJ_2S]  81.03,39.62 90 top
SJ6  Disable LED  [SJ_2S]  124.71,39.62 90 top
SJ7  Disable LED  [SJ_2S]  37.34,62.99 90 top
SJ8  Disable LED  [SJ_2S]  81.03,62.99 90 top
SJ9  Disable LED  [SJ_2S]  124.71,62.99 90 top
SJ10  Disable LED  [SJ_2S]  37.34,86.36 90 top
SJ11  Disable LED  [SJ_2S]  81.03,86.36 90 top
SJ12  Disable LED  [SJ_2S]  124.71,86.36 90 top
SJ13  Disable LED  [SJ_2S]  37.34,109.73 90 top
SJ14  Disable LED  [SJ_2S]  81.03,109.73 90 top
SJ15  Disable LED  [SJ_2S]  124.71,109.73 90 top
STANDOFF1  STAND-OFF  [STAND-OFF]  9.4,27.18 0 top
STANDOFF2  STAND-OFF  [STAND-OFF]  47.5,27.18 0 top
STANDOFF3  STAND-OFF  [STAND-OFF]  53.09,27.18 0 top
STANDOFF4  STAND-OFF  [STAND-OFF]  91.19,27.18 0 top
STANDOFF5  STAND-OFF  [STAND-OFF]  96.77,27.18 0 top
STANDOFF6  STAND-OFF  [STAND-OFF]  134.87,27.18 0 top
STANDOFF7  STAND-OFF  [STAND-OFF]  9.4,50.55 0 top
STANDOFF8  STAND-OFF  [STAND-OFF]  47.5,50.55 0 top
STANDOFF9  STAND-OFF  [STAND-OFF]  53.09,50.55 0 top
STANDOFF10  STAND-OFF  [STAND-OFF]  91.19,50.55 0 top
STANDOFF11  STAND-OFF  [STAND-OFF]  96.77,50.55 0 top
STANDOFF12  STAND-OFF  [STAND-OFF]  134.87,50.55 0 top
STANDOFF13  STAND-OFF  [STAND-OFF]  9.4,73.91 0 top
STANDOFF14  STAND-OFF  [STAND-OFF]  47.5,73.91 0 top
STANDOFF15  STAND-OFF  [STAND-OFF]  53.09,73.91 0 top
STANDOFF16  STAND-OFF  [STAND-OFF]  91.19,73.91 0 top
STANDOFF17  STAND-OFF  [STAND-OFF]  96.77,73.91 0 top
STANDOFF18  STAND-OFF  [STAND-OFF]  134.87,73.91 0 top
STANDOFF19  STAND-OFF  [STAND-OFF]  9.4,97.28 0 top
STANDOFF20  STAND-OFF  [STAND-OFF]  47.5,97.28 0 top
STANDOFF21  STAND-OFF  [STAND-OFF]  53.09,97.28 0 top
STANDOFF22  STAND-OFF  [STAND-OFF]  91.19,97.28 0 top
STANDOFF23  STAND-OFF  [STAND-OFF]  96.77,97.28 0 top
STANDOFF24  STAND-OFF  [STAND-OFF]  134.87,97.28 0 top
STANDOFF25  STAND-OFF  [STAND-OFF]  9.4,120.65 0 top
STANDOFF26  STAND-OFF  [STAND-OFF]  47.5,120.65 0 top
STANDOFF27  STAND-OFF  [STAND-OFF]  53.09,120.65 0 top
STANDOFF28  STAND-OFF  [STAND-OFF]  91.19,120.65 0 top
STANDOFF29  STAND-OFF  [STAND-OFF]  96.77,120.65 0 top
STANDOFF30  STAND-OFF  [STAND-OFF]  134.87,120.65 0 top

## Library data of the parts
C1 C2 C5 C6 C9 C10 C13 C14 C17 C18 C21 C22 C25 C26 C29 C30 C33 C34 C37 C38 C41 C42 C45 C46 C49 C50 C53 C54 C57 C58 = SparkFun-Capacitors; PROD_ID: CAP-10057
C3 C4 C7 C8 C11 C12 C15 C16 C19 C20 C23 C24 C27 C28 C31 C32 C35 C36 C39 C40 C43 C44 C47 C48 C51 C52 C55 C56 C59 C60 = SparkFun-Capacitors; PROD_ID: CAP-00868
D1 D2 D4 D5 D7 D8 D10 D11 D13 D14 D16 D17 D19 D20 D22 D23 D25 D26 D28 D29 D31 D32 D34 D35 D37 D38 D40 D41 D43 D44 = SparkFun-DiscreteSemi; PROD_ID: DIO-11018
D3 D6 D9 D12 D15 D18 D21 D24 D27 D30 D33 D36 D39 D42 D45 = SparkFun-LED; PROD_ID: DIO-00819
E$1 E$4 E$5 FID1-FID30 LOGO1-LOGO45 = SparkFun-Aesthetics
IC1-IC15 = SparkFun-AnalogIC; PROD_ID: IC-08227
JP1-JP15 = SparkFun-Connectors
MIC1-MIC15 = SparkFun-Sensors; PROD_ID: COMP-08856
R1 R16 R20 R34 R39 R53 R58 R72 R77 R91 R96 R110 R115 R129 R134 R148 R153 R167 R172 R186 R191 R205 R210 R224 R229 R243 R248 R262 R267 R281 = SparkFun-Resistors; PROD_ID: RES-08272
R2 R10 R13 R21 R28 R31 R40 R47 R50 R59 R66 R69 R78 R85 R88 R97 R104 R107 R116 R123 R126 R135 R142 R145 R154 R161 R164 R173 R180 R183 R192 R199 R202 R211 R218 R221 R230 R237 R240 R249 R256 R259 R268 R275 R278 = SparkFun-Resistors; PROD_ID: RES-07856
R3 R11 R14 R22 R29 R32 R41 R48 R51 R60 R67 R70 R79 R86 R89 R98 R105 R108 R117 R124 R127 R136 R143 R146 R155 R162 R165 R174 R181 R184 R193 R200 R203 R212 R219 R222 R231 R238 R241 R250 R257 R260 R269 R276 R279 = SparkFun-Resistors; PROD_ID: RES-07828
R4-R6 R9 R23-R26 R42-R45 R61-R64 R80-R83 R99-R102 R118-R121 R137-R140 R156-R159 R175-R178 R194-R197 R213-R216 R232-R235 R251-R254 R270-R273 = SparkFun-Resistors; PROD_ID: RES-00824
R7 R35 R54 R73 R92 R111 R130 R149 R168 R187 R206 R225 R244 R263 R282 = SparkFun-Resistors; PROD_ID: RES-07853
R8 R15 R18 R19 R27 R33 R36 R38 R46 R52 R55 R57 R65 R71 R74 R76 R84 R90 R93 R95 R103 R109 R112 R114 R122 R128 R131 R133 R141 R147 R150 R152 R160 R166 R169 R171 R179 R185 R188 R190 R198 R204 R207 R209 R217 R223 R226 R228 R236 R242 R245 R247 R255 R261 R264 R266 R274 R280 R283 R285 = SparkFun-Resistors; PROD_ID: RES-07863
R12 R30 R49 R68 R87 R106 R125 R144 R163 R182 R201 R220 R239 R258 R277 = SparkFun-Resistors; PROD_ID: RES-07851
R17 R37 R56 R75 R94 R113 R132 R151 R170 R189 R208 R227 R246 R265 R284 = SparkFun-Resistors
SJ1-SJ15 = SparkFun-Passives
STANDOFF1-STANDOFF30 = SparkFun-Electromechanical

## Nets
AMPENV: IC1.14 R10.2 R13.1 R18.1
AMPENV1: IC2.14 R28.2 R31.1 R36.1
AMPENV2: IC3.14 R47.2 R50.1 R55.1
AMPENV3: IC4.14 R66.2 R69.1 R74.1
AMPENV4: IC5.14 R85.2 R88.1 R93.1
AMPENV5: IC6.14 R104.2 R107.1 R112.1
AMPENV6: IC7.14 R123.2 R126.1 R131.1
AMPENV7: IC8.14 R142.2 R145.1 R150.1
AMPENV8: IC9.14 R161.2 R164.1 R169.1
AMPENV9: IC10.14 R180.2 R183.1 R188.1
AMPENV10: IC11.14 R199.2 R202.1 R207.1
AMPENV11: IC12.14 R218.2 R221.1 R226.1
AMPENV12: IC13.14 R237.2 R240.1 R245.1
AMPENV13: IC14.14 R256.2 R259.1 R264.1
AMPENV14: IC15.14 R275.2 R278.1 R283.1
AUDIO: JP1.5 R19.2
AUDIO1: JP2.5 R38.2
AUDIO2: JP3.5 R57.2
AUDIO3: JP4.5 R76.2
AUDIO4: JP5.5 R95.2
AUDIO5: JP6.5 R114.2
AUDIO6: JP7.5 R133.2
AUDIO7: JP8.5 R152.2
AUDIO8: JP9.5 R171.2
AUDIO9: JP10.5 R190.2
AUDIO10: JP11.5 R209.2
AUDIO11: JP12.5 R228.2
AUDIO12: JP13.5 R247.2
AUDIO13: JP14.5 R266.2
AUDIO14: JP15.5 R285.2
ENVELOPE: JP1.4 R18.2
ENVELOPE1: JP2.4 R36.2
ENVELOPE2: JP3.4 R55.2
ENVELOPE3: JP4.4 R74.2
ENVELOPE4: JP5.4 R93.2
ENVELOPE5: JP6.4 R112.2
ENVELOPE6: JP7.4 R131.2
ENVELOPE7: JP8.4 R150.2
ENVELOPE8: JP9.4 R169.2
ENVELOPE9: JP10.4 R188.2
ENVELOPE10: JP11.4 R207.2
ENVELOPE11: JP12.4 R226.2
ENVELOPE12: JP13.4 R245.2
ENVELOPE13: JP14.4 R264.2
ENVELOPE14: JP15.4 R283.2
GATE: JP1.3 R15.2
GATE1: JP2.3 R33.2
GATE2: JP3.3 R52.2
GATE3: JP4.3 R71.2
GATE4: JP5.3 R90.2
GATE5: JP6.3 R109.2
GATE6: JP7.3 R128.2
GATE7: JP8.3 R147.2
GATE8: JP9.3 R166.2
GATE9: JP10.3 R185.2
GATE10: JP11.3 R204.2
GATE11: JP12.3 R223.2
GATE12: JP13.3 R242.2
GATE13: JP14.3 R261.2
GATE14: JP15.3 R280.2
GND: C1.2 C3.2 IC1.5 IC1.11 JP1.1 MIC1.2 R6.1 R9.1 R12.1 R16.1
GND1: C5.2 C8.2 IC2.5 IC2.11 JP2.1 MIC2.2 R25.1 R26.1 R30.1 R34.1
GND2: C9.2 C12.2 IC3.5 IC3.11 JP3.1 MIC3.2 R44.1 R45.1 R49.1 R53.1
GND3: C13.2 C16.2 IC4.5 IC4.11 JP4.1 MIC4.2 R63.1 R64.1 R68.1 R72.1
GND4: C17.2 C20.2 IC5.5 IC5.11 JP5.1 MIC5.2 R82.1 R83.1 R87.1 R91.1
GND5: C21.2 C24.2 IC6.5 IC6.11 JP6.1 MIC6.2 R101.1 R102.1 R106.1 R110.1
GND6: C25.2 C28.2 IC7.5 IC7.11 JP7.1 MIC7.2 R120.1 R121.1 R125.1 R129.1
GND7: C29.2 C32.2 IC8.5 IC8.11 JP8.1 MIC8.2 R139.1 R140.1 R144.1 R148.1
GND8: C33.2 C36.2 IC9.5 IC9.11 JP9.1 MIC9.2 R158.1 R159.1 R163.1 R167.1
GND9: C37.2 C40.2 IC10.5 IC10.11 JP10.1 MIC10.2 R177.1 R178.1 R182.1 R186.1
GND10: C41.2 C44.2 IC11.5 IC11.11 JP11.1 MIC11.2 R196.1 R197.1 R201.1 R205.1
GND11: C45.2 C48.2 IC12.5 IC12.11 JP12.1 MIC12.2 R215.1 R216.1 R220.1 R224.1
GND12: C49.2 C52.2 IC13.5 IC13.11 JP13.1 MIC13.2 R234.1 R235.1 R239.1 R243.1
GND13: C53.2 C56.2 IC14.5 IC14.11 JP14.1 MIC14.2 R253.1 R254.1 R258.1 R262.1
GND14: C57.2 C60.2 IC15.5 IC15.11 JP15.1 MIC15.2 R272.1 R273.1 R277.1 R281.1
N$: C4.1 IC1.1 R3.2 R17.P$2 R19.1
N$1: C2.1 MIC1.1 R1.1
N$2: IC1.3 R5.1 R6.2
N$3: D3.C R16.2
N$4: IC1.2 R2.2 R3.1 R17.P$1
N$5: C2.2 R2.1
N$6: C4.2 R4.1
N$7: D1.A IC1.6 R4.2 R7.1
N$8: D2.A IC1.7
N$9: D1.C D2.C R7.2 R8.1
N$10: C1.1 IC1.12 R8.2 R9.2
N$11: IC1.13 R10.1
N$12: D3.A SJ1.1
N$13: C6.1 MIC2.1 R20.1
N$14: IC2.3 R24.1 R25.2
N$15: IC1.9 R11.1 R12.2
N$16: IC1.10 R13.2 R14.1
N$17: IC1.8 R14.2 R15.1 SJ1.2
N$18: IC2.2 R21.2 R22.1 R37.P$1
N$19: C6.2 R21.1
N$20: C7.2 R23.1
N$21: D4.A IC2.6 R23.2 R35.1
N$22: D5.A IC2.7
N$23: D4.C D5.C R27.1 R35.2
N$24: C5.1 IC2.12 R26.2 R27.2
N$25: IC2.13 R28.1
N$26: IC2.9 R29.1 R30.2
N$27: IC2.10 R31.2 R32.1
N$28: IC2.8 R32.2 R33.1 SJ2.2
N$29: D6.C R34.2
N$30: D6.A SJ2.1
N$31: C7.1 IC2.1 R22.2 R37.P$2 R38.1
N$32: C10.1 MIC3.1 R39.1
N$33: IC3.3 R43.1 R44.2
N$34: IC3.2 R40.2 R41.1 R56.P$1
N$35: C10.2 R40.1
N$36: C11.2 R42.1
N$37: D7.A IC3.6 R42.2 R54.1
N$38: D8.A IC3.7
N$39: D7.C D8.C R46.1 R54.2
N$40: C9.1 IC3.12 R45.2 R46.2
N$41: IC3.13 R47.1
N$42: IC3.9 R48.1 R49.2
N$43: IC3.10 R50.2 R51.1
N$44: IC3.8 R51.2 R52.1 SJ3.2
N$45: D9.C R53.2
N$46: D9.A SJ3.1
N$47: C11.1 IC3.1 R41.2 R56.P$2 R57.1
N$48: C14.1 MIC4.1 R58.1
N$49: IC4.3 R62.1 R63.2
N$50: IC4.2 R59.2 R60.1 R75.P$1
N$51: C14.2 R59.1
N$52: C15.2 R61.1
N$53: D10.A IC4.6 R61.2 R73.1
N$54: D11.A IC4.7
N$55: D10.C D11.C R65.1 R73.2
N$56: C13.1 IC4.12 R64.2 R65.2
N$57: IC4.13 R66.1
N$58: IC4.9 R67.1 R68.2
N$59: IC4.10 R69.2 R70.1
N$60: IC4.8 R70.2 R71.1 SJ4.2
N$61: D12.C R72.2
N$62: D12.A SJ4.1
N$63: C15.1 IC4.1 R60.2 R75.P$2 R76.1
N$64: C18.1 MIC5.1 R77.1
N$65: IC5.3 R81.1 R82.2
N$66: IC5.2 R78.2 R79.1 R94.P$1
N$67: C18.2 R78.1
N$68: C19.2 R80.1
N$69: D13.A IC5.6 R80.2 R92.1
N$70: D14.A IC5.7
N$71: D13.C D14.C R84.1 R92.2
N$72: C17.1 IC5.12 R83.2 R84.2
N$73: IC5.13 R85.1
N$74: IC5.9 R86.1 R87.2
N$75: IC5.10 R88.2 R89.1
N$76: IC5.8 R89.2 R90.1 SJ5.2
N$77: D15.C R91.2
N$78: D15.A SJ5.1
N$79: C19.1 IC5.1 R79.2 R94.P$2 R95.1
N$80: C22.1 MIC6.1 R96.1
N$81: IC6.3 R100.1 R101.2
N$82: IC6.2 R97.2 R98.1 R113.P$1
N$83: C22.2 R97.1
N$84: C23.2 R99.1
N$85: D16.A IC6.6 R99.2 R111.1
N$86: D17.A IC6.7
N$87: D16.C D17.C R103.1 R111.2
N$88: C21.1 IC6.12 R102.2 R103.2
N$89: IC6.13 R104.1
N$90: IC6.9 R105.1 R106.2
N$91: IC6.10 R107.2 R108.1
N$92: IC6.8 R108.2 R109.1 SJ6.2
N$93: D18.C R110.2
N$94: D18.A SJ6.1
N$95: C23.1 IC6.1 R98.2 R113.P$2 R114.1
N$96: C26.1 MIC7.1 R115.1
N$97: IC7.3 R119.1 R120.2
N$98: IC7.2 R116.2 R117.1 R132.P$1
N$99: C26.2 R116.1
N$100: C27.2 R118.1
N$101: D19.A IC7.6 R118.2 R130.1
N$102: D20.A IC7.7
N$103: D19.C D20.C R122.1 R130.2
N$104: C25.1 IC7.12 R121.2 R122.2
N$105: IC7.13 R123.1
N$106: IC7.9 R124.1 R125.2
N$107: IC7.10 R126.2 R127.1
N$108: IC7.8 R127.2 R128.1 SJ7.2
N$109: D21.C R129.2
N$110: D21.A SJ7.1
N$111: C27.1 IC7.1 R117.2 R132.P$2 R133.1
N$112: C30.1 MIC8.1 R134.1
N$113: IC8.3 R138.1 R139.2
N$114: IC8.2 R135.2 R136.1 R151.P$1
N$115: C30.2 R135.1
N$116: C31.2 R137.1
N$117: D22.A IC8.6 R137.2 R149.1
N$118: D23.A IC8.7
N$119: D22.C D23.C R141.1 R149.2
N$120: C29.1 IC8.12 R140.2 R141.2
N$121: IC8.13 R142.1
N$122: IC8.9 R143.1 R144.2
N$123: IC8.10 R145.2 R146.1
N$124: IC8.8 R146.2 R147.1 SJ8.2
N$125: D24.C R148.2
N$126: D24.A SJ8.1
N$127: C31.1 IC8.1 R136.2 R151.P$2 R152.1
N$128: C34.1 MIC9.1 R153.1
N$129: IC9.3 R157.1 R158.2
N$130: IC9.2 R154.2 R155.1 R170.P$1
N$131: C34.2 R154.1
N$132: C35.2 R156.1
N$133: D25.A IC9.6 R156.2 R168.1
N$134: D26.A IC9.7
N$135: D25.C D26.C R160.1 R168.2
N$136: C33.1 IC9.12 R159.2 R160.2
N$137: IC9.13 R161.1
N$138: IC9.9 R162.1 R163.2
N$139: IC9.10 R164.2 R165.1
N$140: IC9.8 R165.2 R166.1 SJ9.2
N$141: D27.C R167.2
N$142: D27.A SJ9.1
N$143: C35.1 IC9.1 R155.2 R170.P$2 R171.1
N$144: C38.1 MIC10.1 R172.1
N$145: IC10.3 R176.1 R177.2
N$146: IC10.2 R173.2 R174.1 R189.P$1
N$147: C38.2 R173.1
N$148: C39.2 R175.1
N$149: D28.A IC10.6 R175.2 R187.1
N$150: D29.A IC10.7
N$151: D28.C D29.C R179.1 R187.2
N$152: C37.1 IC10.12 R178.2 R179.2
N$153: IC10.13 R180.1
N$154: IC10.9 R181.1 R182.2
N$155: IC10.10 R183.2 R184.1
N$156: IC10.8 R184.2 R185.1 SJ10.2
N$157: D30.C R186.2
N$158: D30.A SJ10.1
N$159: C39.1 IC10.1 R174.2 R189.P$2 R190.1
N$160: C42.1 MIC11.1 R191.1
N$161: IC11.3 R195.1 R196.2
N$162: IC11.2 R192.2 R193.1 R208.P$1
N$163: C42.2 R192.1
N$164: C43.2 R194.1
N$165: D31.A IC11.6 R194.2 R206.1
N$166: D32.A IC11.7
N$167: D31.C D32.C R198.1 R206.2
N$168: C41.1 IC11.12 R197.2 R198.2
N$169: IC11.13 R199.1
N$170: IC11.9 R200.1 R201.2
N$171: IC11.10 R202.2 R203.1
N$172: IC11.8 R203.2 R204.1 SJ11.2
N$173: D33.C R205.2
N$174: D33.A SJ11.1
N$175: C43.1 IC11.1 R193.2 R208.P$2 R209.1
N$176: C46.1 MIC12.1 R210.1
N$177: IC12.3 R214.1 R215.2
N$178: IC12.2 R211.2 R212.1 R227.P$1
N$179: C46.2 R211.1
N$180: C47.2 R213.1
N$181: D34.A IC12.6 R213.2 R225.1
N$182: D35.A IC12.7
N$183: D34.C D35.C R217.1 R225.2
N$184: C45.1 IC12.12 R216.2 R217.2
N$185: IC12.13 R218.1
N$186: IC12.9 R219.1 R220.2
N$187: IC12.10 R221.2 R222.1
N$188: IC12.8 R222.2 R223.1 SJ12.2
N$189: D36.C R224.2
N$190: D36.A SJ12.1
N$191: C47.1 IC12.1 R212.2 R227.P$2 R228.1
N$192: C50.1 MIC13.1 R229.1
N$193: IC13.3 R233.1 R234.2
N$194: IC13.2 R230.2 R231.1 R246.P$1
N$195: C50.2 R230.1
N$196: C51.2 R232.1
N$197: D37.A IC13.6 R232.2 R244.1
N$198: D38.A IC13.7
N$199: D37.C D38.C R236.1 R244.2
N$200: C49.1 IC13.12 R235.2 R236.2
N$201: IC13.13 R237.1
N$202: IC13.9 R238.1 R239.2
N$203: IC13.10 R240.2 R241.1
N$204: IC13.8 R241.2 R242.1 SJ13.2
N$205: D39.C R243.2
N$206: D39.A SJ13.1
N$207: C51.1 IC13.1 R231.2 R246.P$2 R247.1
N$208: C54.1 MIC14.1 R248.1
N$209: IC14.3 R252.1 R253.2
N$210: IC14.2 R249.2 R250.1 R265.P$1
N$211: C54.2 R249.1
N$212: C55.2 R251.1
N$213: D40.A IC14.6 R251.2 R263.1
N$214: D41.A IC14.7
N$215: D40.C D41.C R255.1 R263.2
N$216: C53.1 IC14.12 R254.2 R255.2
N$217: IC14.13 R256.1
N$218: IC14.9 R257.1 R258.2
N$219: IC14.10 R259.2 R260.1
N$220: IC14.8 R260.2 R261.1 SJ14.2
N$221: D42.C R262.2
N$222: D42.A SJ14.1
N$223: C55.1 IC14.1 R250.2 R265.P$2 R266.1
N$224: C58.1 MIC15.1 R267.1
N$225: IC15.3 R271.1 R272.2
N$226: IC15.2 R268.2 R269.1 R284.P$1
N$227: C58.2 R268.1
N$228: C59.2 R270.1
N$229: D43.A IC15.6 R270.2 R282.1
N$230: D44.A IC15.7
N$231: D43.C D44.C R274.1 R282.2
N$232: C57.1 IC15.12 R273.2 R274.2
N$233: IC15.13 R275.1
N$234: IC15.9 R276.1 R277.2
N$235: IC15.10 R278.2 R279.1
N$236: IC15.8 R279.2 R280.1 SJ15.2
N$237: D45.C R281.2
N$238: D45.A SJ15.1
N$239: C59.1 IC15.1 R269.2 R284.P$2 R285.1
VCC: C3.1 IC1.4 JP1.2 R1.2 R5.2 R11.2
VCC1: C8.1 IC2.4 JP2.2 R20.2 R24.2 R29.2
VCC2: C12.1 IC3.4 JP3.2 R39.2 R43.2 R48.2
VCC3: C16.1 IC4.4 JP4.2 R58.2 R62.2 R67.2
VCC4: C20.1 IC5.4 JP5.2 R77.2 R81.2 R86.2
VCC5: C24.1 IC6.4 JP6.2 R96.2 R100.2 R105.2
VCC6: C28.1 IC7.4 JP7.2 R115.2 R119.2 R124.2
VCC7: C32.1 IC8.4 JP8.2 R134.2 R138.2 R143.2
VCC8: C36.1 IC9.4 JP9.2 R153.2 R157.2 R162.2
VCC9: C40.1 IC10.4 JP10.2 R172.2 R176.2 R181.2
VCC10: C44.1 IC11.4 JP11.2 R191.2 R195.2 R200.2
VCC11: C48.1 IC12.4 JP12.2 R210.2 R214.2 R219.2
VCC12: C52.1 IC13.4 JP13.2 R229.2 R233.2 R238.2
VCC13: C56.1 IC14.4 JP14.2 R248.2 R252.2 R257.2
VCC14: C60.1 IC15.4 JP15.2 R267.2 R271.2 R276.2

## Tracks (layer width: path | path; a pad name or v marks a point on that pad's centre or on a via)
AMPENV
  Top 0.406: R13.1 R18.1 22.69,25.06 22.1,25.65 22.1,26.16 21.5,26.76 R10.2 19.77,26.76 19.56,26.54 19.56,23.37 20.19,22.73 22.48,22.73 22.73,22.48 IC1.14
AMPENV1
  Top 0.406: R31.1 R36.1 66.38,25.06 65.79,25.65 65.79,26.16 65.19,26.76 R28.2 63.46,26.76 63.25,26.54 63.25,23.37 63.88,22.73 66.17,22.73 66.42,22.48 IC2.14
AMPENV2
  Top 0.406: R50.1 R55.1 110.07,25.06 109.47,25.65 109.47,26.16 108.88,26.76 R47.2 107.15,26.76 106.93,26.54 106.93,23.37 107.57,22.73 109.86,22.73 110.11,22.48 IC3.14
AMPENV3
  Top 0.406: R69.1 R74.1 22.69,48.43 22.1,49.02 22.1,49.53 21.5,50.13 R66.2 19.77,50.13 19.56,49.91 19.56,46.74 20.19,46.1 22.48,46.1 22.73,45.85 IC4.14
AMPENV4
  Top 0.406: R88.1 R93.1 66.38,48.43 65.79,49.02 65.79,49.53 65.19,50.13 R85.2 63.46,50.13 63.25,49.91 63.25,46.74 63.88,46.1 66.17,46.1 66.42,45.85 IC5.14
AMPENV5
  Top 0.406: R107.1 R112.1 110.07,48.43 109.47,49.02 109.47,49.53 108.88,50.13 R104.2 107.15,50.13 106.93,49.91 106.93,46.74 107.57,46.1 109.86,46.1 110.11,45.85 IC6.14
AMPENV6
  Top 0.406: R126.1 R131.1 22.69,71.79 22.1,72.39 22.1,72.9 21.5,73.49 R123.2 19.77,73.49 19.56,73.28 19.56,70.1 20.19,69.47 22.48,69.47 22.73,69.22 IC7.14
AMPENV7
  Top 0.406: R145.1 R150.1 66.38,71.79 65.79,72.39 65.79,72.9 65.19,73.49 R142.2 63.46,73.49 63.25,73.28 63.25,70.1 63.88,69.47 66.17,69.47 66.42,69.22 IC8.14
AMPENV8
  Top 0.406: R164.1 R169.1 110.07,71.79 109.47,72.39 109.47,72.9 108.88,73.49 R161.2 107.15,73.49 106.93,73.28 106.93,70.1 107.57,69.47 109.86,69.47 110.11,69.22 IC9.14
AMPENV9
  Top 0.406: R183.1 R188.1 22.69,95.16 22.1,95.76 22.1,96.27 21.5,96.86 R180.2 19.77,96.86 19.56,96.65 19.56,93.47 20.19,92.84 22.48,92.84 22.73,92.58 IC10.14
AMPENV10
  Top 0.406: R202.1 R207.1 66.38,95.16 65.79,95.76 65.79,96.27 65.19,96.86 R199.2 63.46,96.86 63.25,96.65 63.25,93.47 63.88,92.84 66.17,92.84 66.42,92.58 IC11.14
AMPENV11
  Top 0.406: R221.1 R226.1 110.07,95.16 109.47,95.76 109.47,96.27 108.88,96.86 R218.2 107.15,96.86 106.93,96.65 106.93,93.47 107.57,92.84 109.86,92.84 110.11,92.58 IC12.14
AMPENV12
  Top 0.406: R240.1 R245.1 22.69,118.53 22.1,119.13 22.1,119.63 21.5,120.23 R237.2 19.77,120.23 19.56,120.02 19.56,116.84 20.19,116.2 22.48,116.2 22.73,115.95 IC13.14
AMPENV13
  Top 0.406: R259.1 R264.1 66.38,118.53 65.79,119.13 65.79,119.63 65.19,120.23 R256.2 63.46,120.23 63.25,120.02 63.25,116.84 63.88,116.2 66.17,116.2 66.42,115.95 IC14.14
AMPENV14
  Top 0.406: R278.1 R283.1 110.07,118.53 109.47,119.13 109.47,119.63 108.88,120.23 R275.2 107.15,120.23 106.93,120.02 106.93,116.84 107.57,116.2 109.86,116.2 110.11,115.95 IC15.14
AUDIO
  Top 0.406: JP1.5 47.5,22.1 46.23,20.83 46.23,9.4 44.96,8.13 30.35,8.13 29.72,8.76 R19.2
AUDIO1
  Top 0.406: JP2.5 91.19,22.1 89.92,20.83 89.92,9.4 88.65,8.13 74.04,8.13 73.41,8.76 R38.2
AUDIO2
  Top 0.406: JP3.5 134.87,22.1 133.6,20.83 133.6,9.4 132.33,8.13 117.73,8.13 117.09,8.76 R57.2
AUDIO3
  Top 0.406: JP4.5 47.5,45.47 46.23,44.2 46.23,32.77 44.96,31.5 30.35,31.5 29.72,32.13 R76.2
AUDIO4
  Top 0.406: JP5.5 91.19,45.47 89.92,44.2 89.92,32.77 88.65,31.5 74.04,31.5 73.41,32.13 R95.2
AUDIO5
  Top 0.406: JP6.5 134.87,45.47 133.6,44.2 133.6,32.77 132.33,31.5 117.73,31.5 117.09,32.13 R114.2
AUDIO6
  Top 0.406: JP7.5 47.5,68.83 46.23,67.56 46.23,56.13 44.96,54.86 30.35,54.86 29.72,55.5 R133.2
AUDIO7
  Top 0.406: JP8.5 91.19,68.83 89.92,67.56 89.92,56.13 88.65,54.86 74.04,54.86 73.41,55.5 R152.2
AUDIO8
  Top 0.406: JP9.5 134.87,68.83 133.6,67.56 133.6,56.13 132.33,54.86 117.73,54.86 117.09,55.5 R171.2
AUDIO9
  Top 0.406: JP10.5 47.5,92.2 46.23,90.93 46.23,79.5 44.96,78.23 30.35,78.23 29.72,78.87 R190.2
AUDIO10
  Top 0.406: JP11.5 91.19,92.2 89.92,90.93 89.92,79.5 88.65,78.23 74.04,78.23 73.41,78.87 R209.2
AUDIO11
  Top 0.406: JP12.5 134.87,92.2 133.6,90.93 133.6,79.5 132.33,78.23 117.73,78.23 117.09,78.87 R228.2
AUDIO12
  Top 0.406: JP13.5 47.5,115.57 46.23,114.3 46.23,102.87 44.96,101.6 30.35,101.6 29.72,102.23 R247.2
AUDIO13
  Top 0.406: JP14.5 91.19,115.57 89.92,114.3 89.92,102.87 88.65,101.6 74.04,101.6 73.41,102.23 R266.2
AUDIO14
  Top 0.406: JP15.5 134.87,115.57 133.6,114.3 133.6,102.87 132.33,101.6 117.73,101.6 117.09,102.23 R285.2
ENVELOPE  (via drill 0.51)
  Top 0.406: R18.2 23.37,28.45 24,29.08 41.78,29.08 42.42,28.45 v42.42,25.27
  Bottom 0.406: v42.42,25.27 42.42,20.83 43.69,19.56 JP1.4
ENVELOPE1  (via drill 0.51)
  Top 0.406: R36.2 67.06,28.45 67.69,29.08 85.47,29.08 86.11,28.45 v86.11,25.27
  Bottom 0.406: v86.11,25.27 86.11,20.83 87.38,19.56 JP2.4
ENVELOPE2  (via drill 0.51)
  Top 0.406: R55.2 110.74,28.45 111.38,29.08 129.16,29.08 129.79,28.45 v129.79,25.27
  Bottom 0.406: v129.79,25.27 129.79,20.83 131.06,19.56 JP3.4
ENVELOPE3  (via drill 0.51)
  Top 0.406: R74.2 23.37,51.82 24,52.45 41.78,52.45 42.42,51.82 v42.42,48.64
  Bottom 0.406: v42.42,48.64 42.42,44.2 43.69,42.93 JP4.4
ENVELOPE4  (via drill 0.51)
  Top 0.406: R93.2 67.06,51.82 67.69,52.45 85.47,52.45 86.11,51.82 v86.11,48.64
  Bottom 0.406: v86.11,48.64 86.11,44.2 87.38,42.93 JP5.4
ENVELOPE5  (via drill 0.51)
  Top 0.406: R112.2 110.74,51.82 111.38,52.45 129.16,52.45 129.79,51.82 v129.79,48.64
  Bottom 0.406: v129.79,48.64 129.79,44.2 131.06,42.93 JP6.4
ENVELOPE6  (via drill 0.51)
  Top 0.406: R131.2 23.37,75.18 24,75.82 41.78,75.82 42.42,75.18 v42.42,72.01
  Bottom 0.406: v42.42,72.01 42.42,67.56 43.69,66.29 JP7.4
ENVELOPE7  (via drill 0.51)
  Top 0.406: R150.2 67.06,75.18 67.69,75.82 85.47,75.82 86.11,75.18 v86.11,72.01
  Bottom 0.406: v86.11,72.01 86.11,67.56 87.38,66.29 JP8.4
ENVELOPE8  (via drill 0.51)
  Top 0.406: R169.2 110.74,75.18 111.38,75.82 129.16,75.82 129.79,75.18 v129.79,72.01
  Bottom 0.406: v129.79,72.01 129.79,67.56 131.06,66.29 JP9.4
ENVELOPE9  (via drill 0.51)
  Top 0.406: R188.2 23.37,98.55 24,99.19 41.78,99.19 42.42,98.55 v42.42,95.38
  Bottom 0.406: v42.42,95.38 42.42,90.93 43.69,89.66 JP10.4
ENVELOPE10  (via drill 0.51)
  Top 0.406: R207.2 67.06,98.55 67.69,99.19 85.47,99.19 86.11,98.55 v86.11,95.38
  Bottom 0.406: v86.11,95.38 86.11,90.93 87.38,89.66 JP11.4
ENVELOPE11  (via drill 0.51)
  Top 0.406: R226.2 110.74,98.55 111.38,99.19 129.16,99.19 129.79,98.55 v129.79,95.38
  Bottom 0.406: v129.79,95.38 129.79,90.93 131.06,89.66 JP12.4
ENVELOPE12  (via drill 0.51)
  Top 0.406: R245.2 23.37,121.92 24,122.56 41.78,122.56 42.42,121.92 v42.42,118.75
  Bottom 0.406: v42.42,118.75 42.42,114.3 43.69,113.03 JP13.4
ENVELOPE13  (via drill 0.51)
  Top 0.406: R264.2 67.06,121.92 67.69,122.56 85.47,122.56 86.11,121.92 v86.11,118.75
  Bottom 0.406: v86.11,118.75 86.11,114.3 87.38,113.03 JP14.4
ENVELOPE14  (via drill 0.51)
  Top 0.406: R283.2 110.74,121.92 111.38,122.56 129.16,122.56 129.79,121.92 v129.79,118.75
  Bottom 0.406: v129.79,118.75 129.79,114.3 131.06,113.03 JP15.4
GATE  (via drill 0.51)
  Top 0.406: R15.2 39.03,26.76 v39.88,25.91
  Bottom 0.406: JP1.3 41.15,17.02 39.88,18.29 v39.88,25.91
GATE1  (via drill 0.51)
  Top 0.406: R33.2 82.72,26.76 v83.57,25.91
  Bottom 0.406: JP2.3 84.84,17.02 83.57,18.29 v83.57,25.91
GATE2  (via drill 0.51)
  Top 0.406: R52.2 126.4,26.76 v127.25,25.91
  Bottom 0.406: JP3.3 128.52,17.02 127.25,18.29 v127.25,25.91
GATE3  (via drill 0.51)
  Top 0.406: R71.2 39.03,50.13 v39.88,49.28
  Bottom 0.406: JP4.3 41.15,40.39 39.88,41.66 v39.88,49.28
GATE4  (via drill 0.51)
  Top 0.406: R90.2 82.72,50.13 v83.57,49.28
  Bottom 0.406: JP5.3 84.84,40.39 83.57,41.66 v83.57,49.28
GATE5  (via drill 0.51)
  Top 0.406: R109.2 126.4,50.13 v127.25,49.28
  Bottom 0.406: JP6.3 128.52,40.39 127.25,41.66 v127.25,49.28
GATE6  (via drill 0.51)
  Top 0.406: R128.2 39.03,73.49 v39.88,72.64
  Bottom 0.406: JP7.3 41.15,63.75 39.88,65.02 v39.88,72.64
GATE7  (via drill 0.51)
  Top 0.406: R147.2 82.72,73.49 v83.57,72.64
  Bottom 0.406: JP8.3 84.84,63.75 83.57,65.02 v83.57,72.64
GATE8  (via drill 0.51)
  Top 0.406: R166.2 126.4,73.49 v127.25,72.64
  Bottom 0.406: JP9.3 128.52,63.75 127.25,65.02 v127.25,72.64
GATE9  (via drill 0.51)
  Top 0.406: R185.2 39.03,96.86 v39.88,96.01
  Bottom 0.406: JP10.3 41.15,87.12 39.88,88.39 v39.88,96.01
GATE10  (via drill 0.51)
  Top 0.406: R204.2 82.72,96.86 v83.57,96.01
  Bottom 0.406: JP11.3 84.84,87.12 83.57,88.39 v83.57,96.01
GATE11  (via drill 0.51)
  Top 0.406: R223.2 126.4,96.86 v127.25,96.01
  Bottom 0.406: JP12.3 128.52,87.12 127.25,88.39 v127.25,96.01
GATE12  (via drill 0.51)
  Top 0.406: R242.2 39.03,120.23 v39.88,119.38
  Bottom 0.406: JP13.3 41.15,110.49 39.88,111.76 v39.88,119.38
GATE13  (via drill 0.51)
  Top 0.406: R261.2 82.72,120.23 v83.57,119.38
  Bottom 0.406: JP14.3 84.84,110.49 83.57,111.76 v83.57,119.38
GATE14  (via drill 0.51)
  Top 0.406: R280.2 126.4,120.23 v127.25,119.38
  Bottom 0.406: JP15.3 128.52,110.49 127.25,111.76 v127.25,119.38
GND  (via drill 0.51)
  other vias: 29.72,27.18 25.91,22.73 44.96,10.67 44.96,15.75 43.69,23.37 44.96,18.29 30.99,17.02 28.45,17.02 48.77,8.13 23.37,8.13 37.34,23.37 37.34,19.56 20.19,12.19 27.81,13.84
  pour Bottom (isolate 0.305): 6.86,6.86 6.86,29.72 50.04,29.72 50.04,6.86
  pour Top (isolate 0.305): 6.86,6.86 6.86,29.72 50.04,29.72 50.04,6.86
GND1  (via drill 0.51)
  other vias: 73.41,27.18 69.6,22.73 88.65,10.67 88.65,15.75 87.38,23.37 88.65,18.29 74.68,17.02 72.14,17.02 92.46,8.13 67.06,8.13 81.03,23.37 81.03,19.56 63.88,12.19 71.5,13.84
  pour Bottom (isolate 0.305): 50.55,6.86 50.55,29.72 93.73,29.72 93.73,6.86
  pour Top (isolate 0.305): 50.55,6.86 50.55,29.72 93.73,29.72 93.73,6.86
GND2  (via drill 0.51)
  other vias: 117.09,27.18 113.28,22.73 132.33,10.67 132.33,15.75 131.06,23.37 132.33,18.29 118.36,17.02 115.82,17.02 136.14,8.13 110.74,8.13 124.71,23.37 124.71,19.56 107.57,12.19 115.19,13.84
  pour Bottom (isolate 0.305): 94.23,6.86 94.23,29.72 137.41,29.72 137.41,6.86
  pour Top (isolate 0.305): 94.23,6.86 94.23,29.72 137.41,29.72 137.41,6.86
GND3  (via drill 0.51)
  other vias: 29.72,50.55 25.91,46.1 44.96,34.04 44.96,39.12 43.69,46.74 44.96,41.66 30.99,40.39 28.45,40.39 48.77,31.5 23.37,31.5 37.34,46.74 37.34,42.93 20.19,35.56 27.81,37.21
  pour Bottom (isolate 0.305): 6.86,30.23 6.86,53.09 50.04,53.09 50.04,30.23
  pour Top (isolate 0.305): 6.86,30.23 6.86,53.09 50.04,53.09 50.04,30.23
GND4  (via drill 0.51)
  other vias: 73.41,50.55 69.6,46.1 88.65,34.04 88.65,39.12 87.38,46.74 88.65,41.66 74.68,40.39 72.14,40.39 92.46,31.5 67.06,31.5 81.03,46.74 81.03,42.93 63.88,35.56 71.5,37.21
  pour Bottom (isolate 0.305): 50.55,30.23 50.55,53.09 93.73,53.09 93.73,30.23
  pour Top (isolate 0.305): 50.55,30.23 50.55,53.09 93.73,53.09 93.73,30.23
GND5  (via drill 0.51)